# Altium PCB barrido.PcbDoc
Units mm, origin at the board's own origin, x right, y up, seen from the top; angles counter-clockwise.
Board outline 55.25 x 38.25 mm, 2 copper layers (Top Layer, Bottom Layer); 34 components, 46 nets, 104 pads, 14 vias.
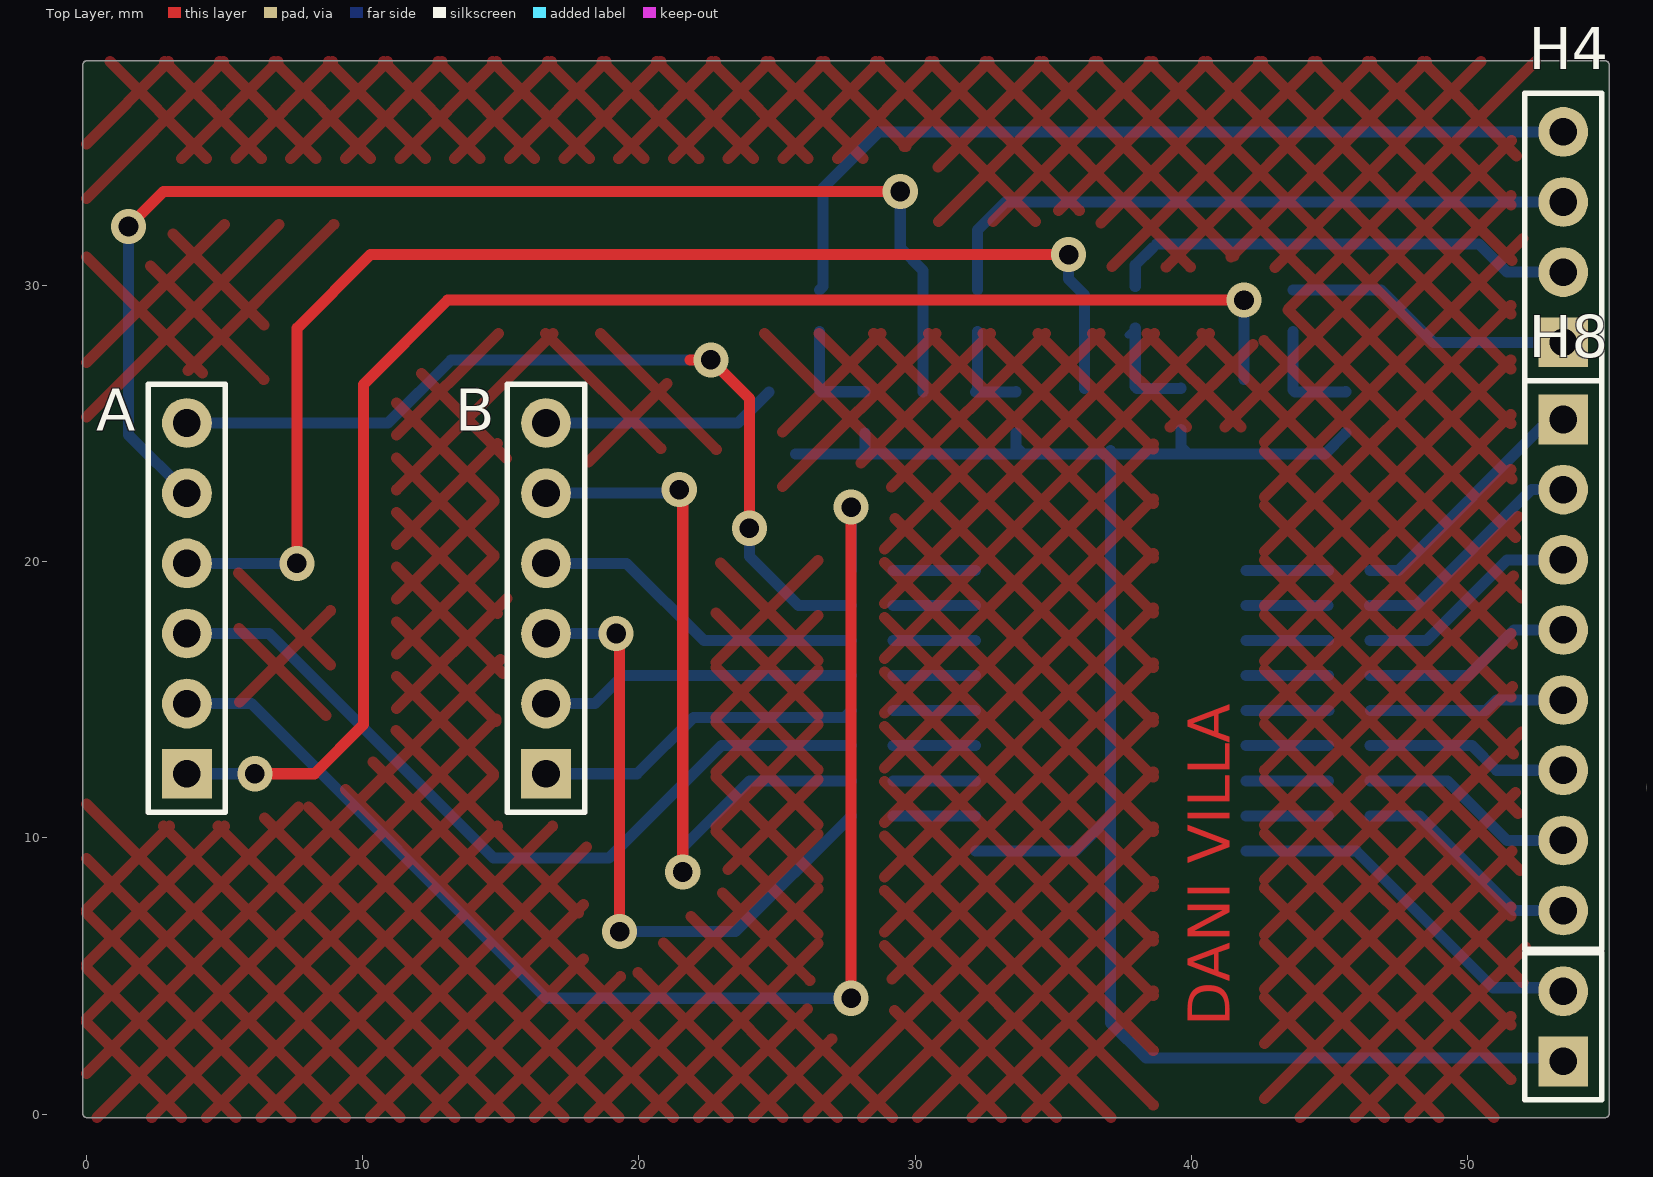
[diagram p0: Top Layer view]
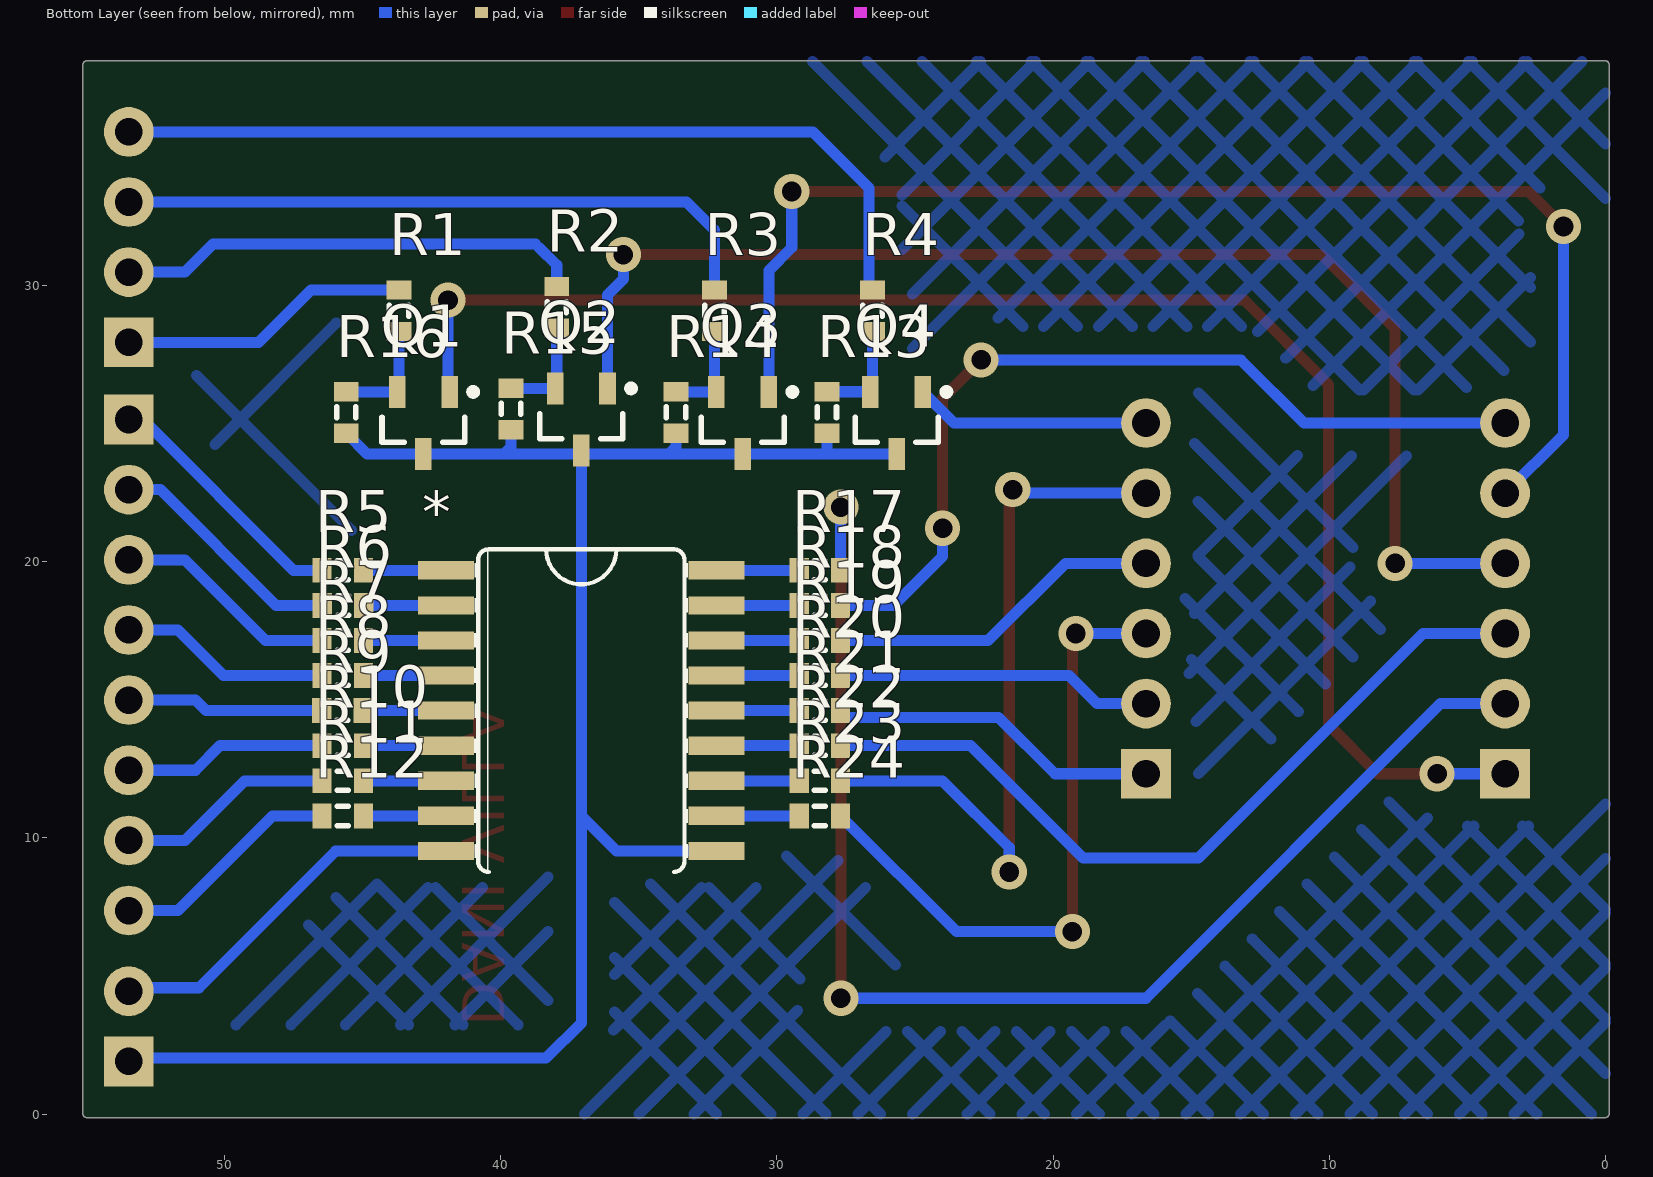
[diagram p1: Bottom Layer view, seen from below]
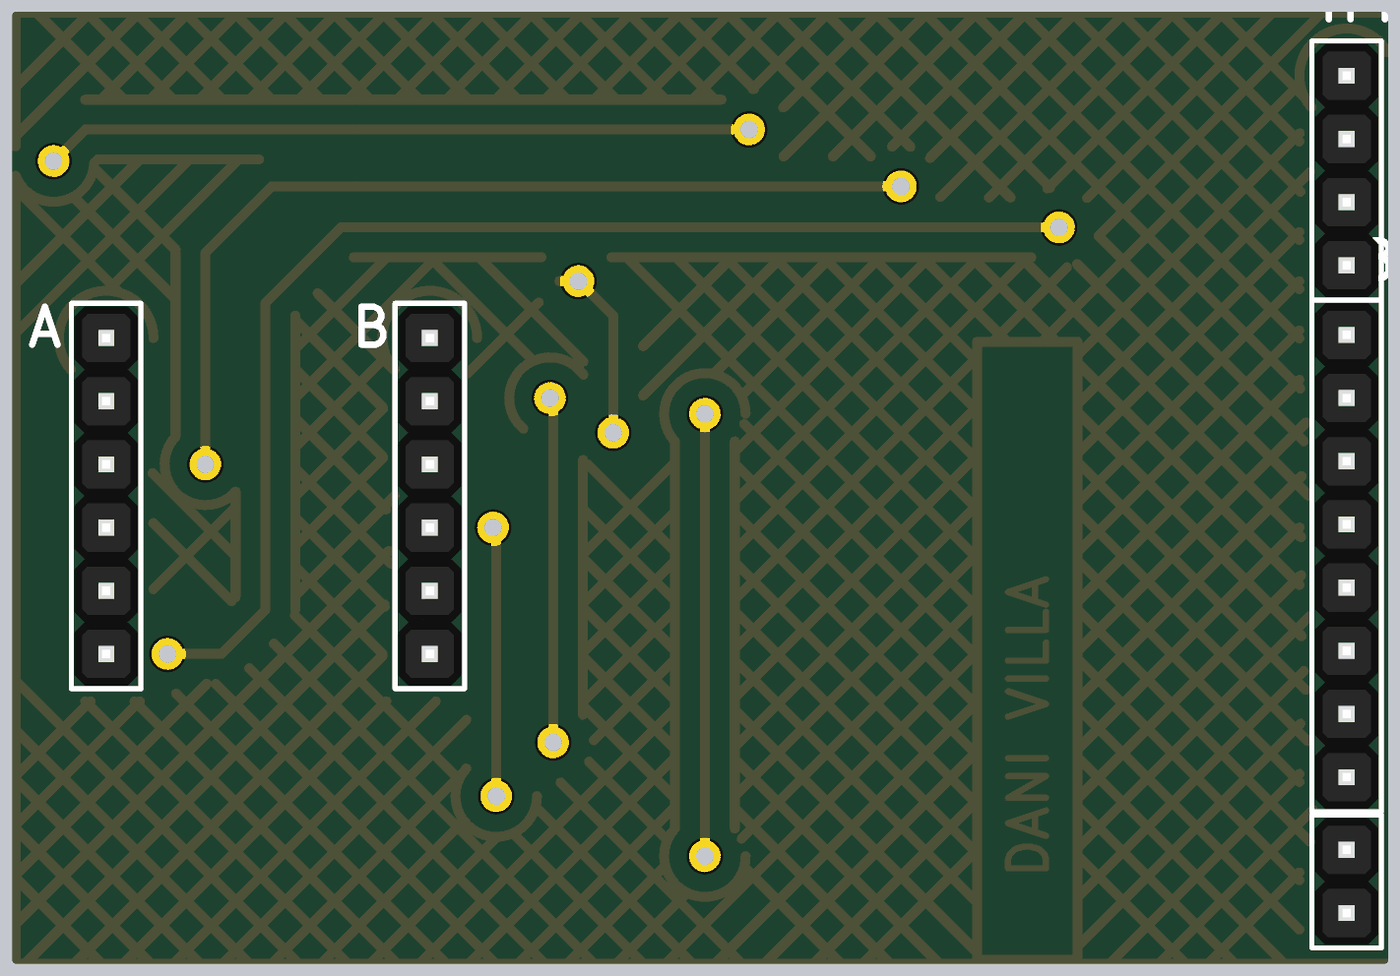
[diagram p2: 3D render of the assembled board from above, using the file's embedded part models]

## Layer stack, top to bottom
Top Solder: solder mask 0.0102, Solder Resist, Dk 3.5
Top Layer: signal copper 0.0356
Dielectric 1: dielectric 0.32, FR-4, Dk 4.8
Bottom Layer: signal copper 0.0356
Bottom Solder: solder mask 0.0102, Solder Resist, Dk 3.5

## Board outline
-0.127,0 -0.127,37.973 cw(c0,37.973) -0.127,37.987 cw(c0,38) 0,38.127 55,38.127 cw(c55,38) 55.127,38 55.127,0 cw(c55,0) 55,-0.127 0,-0.127 cw(c0,0)

## Design rules (kind name [scope] priority, off if disabled: settings)
Clearance Mallac [InPolygon] p1: gap=0.8 ignorepadtopadclearanceinfootprint=FALSE
Clearance [All] p2: gap=0.254 ignorepadtopadclearanceinfootprint=FALSE except(0: Arc-Hole Track-Hole SMDPad-Hole THPad-Hole Via-Hole Fill-Hole Poly-Hole Region-Hole Text-Hole)
PolygonConnect [All] p1: connectstyle=Relief reliefconductorwidth=0.254 reliefentries=4 polygonreliefangle="90 Angle" airgapwidth=0.254
RoutingVias [All] p1: holewidth=0.711 width=1.27 viastyle="Through Hole" minholewidth=0.711 minwidth=1.27 maxholewidth=0.711 maxwidth=1.27
SolderMaskExpansion [All] p1: expansion=0.102 istentingtop=FALSE
Width Mallaw [InPolygon] p1: maxlimit=0.6 minlimit=0.3 preferedwidth=0.5
Width [All] p2: maxlimit=0.6 minlimit=0.3 preferedwidth=0.4
30 further rules are at their usual default settings.

## Components (designator, comment, footprint, x,y, rotation, side; value= is the part's Value field where it differs from the comment)
* "uln2803" *SO18L 37.084,14.605 r270 bottom
A "Connector" "1x6x2.54 Pin Header TH V" 3.637,18.669 r90 top
B "Connector" "1x6x2.54 Pin Header TH V" 16.637,18.669 r90 top
CONN? "Connector" "1x2x2.54 Pin Header TH V" 53.467,3.175 r90 top
H4 "Connector" "1x4x2.54 Pin Header TH V" 53.467,31.75 r90 top
H8 "Connector" "1x8x2.54 Pin Header TH V" 53.467,16.256 r270 top
Q1 "PNP" SOT-23B_N 42.799,25.019 r270 bottom
Q2 "PNP" SOT-23B_N 37.084,25.146 r270 bottom
Q3 "PNP" SOT-23B_N 31.242,25.019 r270 bottom
Q4 "PNP" SOT-23B_N 25.666,25.019 r270 bottom
R1 "Res3" J1-0603 43.688,29.083 r270 bottom value=1K
R2 "Res3" J1-0603 37.973,29.21 r270 bottom value=1K
R3 "Res3" J1-0603 32.258,29.083 r270 bottom value=1K
R4 "Res3" J1-0603 26.543,29.083 r270 bottom value=1K
R5 "Res3" J1-0603 45.72,19.685 r180 bottom value=1K
R6 "Res3" J1-0603 45.708,18.415 r180 bottom value=1K
R7 "Res3" J1-0603 45.72,17.145 r180 bottom value=1K
R8 "Res3" J1-0603 45.72,15.875 r180 bottom value=1K
R9 "Res3" J1-0603 45.732,14.605 r180 bottom value=1K
R10 "Res3" J1-0603 45.72,13.335 r180 bottom value=1K
R11 "Res3" J1-0603 45.72,12.065 r180 bottom value=1K
R12 "Res3" J1-0603 45.72,10.795 r180 bottom value=1K
R13 "Res3" J1-0603 28.194,25.4 r270 bottom value=1K
R14 "Res3" J1-0603 33.655,25.4 r270 bottom value=1K
R15 "Res3" J1-0603 39.624,25.527 r270 bottom value=1K
R16 "Res3" J1-0603 45.593,25.4 r270 bottom value=1K
R17 "Res3" J1-0603 28.448,19.685 r180 bottom value=1K
R18 "Res3" J1-0603 28.448,18.415 r180 bottom value=1K
R19 "Res3" J1-0603 28.448,17.145 r180 bottom value=1K
R20 "Res3" J1-0603 28.448,15.875 r180 bottom value=1K
R21 "Res3" J1-0603 28.448,14.605 r180 bottom value=1K
R22 "Res3" J1-0603 28.448,13.335 r180 bottom value=1K
R23 "Res3" J1-0603 28.448,12.065 r180 bottom value=1K
R24 "Res3" J1-0603 28.448,10.795 r180 bottom value=1K

## Footprints (in the part's own frame and the unit in brackets; to place one, negate y for a bottom-side part, rotate by r counter-clockwise, add the part's x,y. Pads: shape width x height; smd on the part's side, far side on the other; paste and mask are expansions set on the pad)
"1x2x2.54 Pin Header TH V" [mm] "1x2x2.54 Pin Header TH V"
  rect 1.8x1.8 hole 1: 1(-1.27,0)
  round 1.8 hole 1: 2(1.27,0)
  silkscreen extent -2.67,-1.4 2.67,1.4, body extent -2.54,-1.27 2.54,1.27, height 8.55
"1x4x2.54 Pin Header TH V" [mm] "1x4x2.54 Pin Header TH V"
  rect 1.8x1.8 hole 1: 1(-3.81,0)
  round 1.8 hole 1: 2(-1.27,0) 3(1.27,0) 4(3.81,0)
  silkscreen extent -5.21,-1.4 5.21,1.4, body extent -5.08,-1.27 5.08,1.27, height 8.55
"1x6x2.54 Pin Header TH V" [mm] "1x6x2.54 Pin Header TH V"
  rect 1.8x1.8 hole 1: 1(-6.35,0)
  round 1.8 hole 1: 2(-3.81,0) 3(-1.27,0) 4(1.27,0) 5(3.81,0) 6(6.35,0)
  silkscreen extent -7.75,-1.4 7.75,1.4, body extent -7.62,-1.27 7.62,1.27, height 8.55
"1x8x2.54 Pin Header TH V" [mm] "1x8x2.54 Pin Header TH V"
  rect 1.8x1.8 hole 1: 1(-8.89,0)
  round 1.8 hole 1: 2(-6.35,0) 3(-3.81,0) 4(-1.27,0) 5(1.27,0) 6(3.81,0) 7(6.35,0) 8(8.89,0)
  silkscreen extent -10.29,-1.4 10.29,1.4, body extent -10.16,-1.27 10.16,1.27, height 8.55
*SO18L [mil]
  rect 26x80 smd: 1(-200,-193) 2(-150,-193) 3(-100,-193) 4(-50,-193) 5(0,-193) 6(50,-193) 7(100,-193) 8(150,-193) 9(200,-193) 10(200,193) 11(150,193) 12(100,193) 13(50,193) 14(0,193) 15(-50,193) 16(-100,193) 17(-150,193) 18(-200,193)
  silkscreen extent -230,-152 230,152
J1-0603 [mm] "Chip Resistor, Body 1.6x0.8mm, IPC High Density"
  rect 0.7x0.9 smd: 1(-0.75,0) 2(0.75,0)
  silkscreen extent -0.2,-0.35 0.2,0.35, body extent -0.85,-0.48 0.85,0.48, height 0.9
SOT-23B_N [mm] "SOT23, 3-Leads, Body 2.9x1.3mm, Pitch 0.95mm, Lead Span 2.4mm, IPC Medium Density"
  rect 1.15x0.6 smd: 1(-1.125,0.95) 2(-1.125,-0.95) 3(1.125,0)
  silkscreen extent -1.25,-1.5 0.7,1.92, body extent -0.7,-1.5 0.7,1.5, height 1.14

## Part data
A B: library part "Header 1x6"
CONN?: library part "Header 1x2"
H4: library part "Header 1x4"
H8: library part "Header 1x8"
Q1 Q2 Q3 Q4: "PNP Bipolar Transistor", LatestRevisionDate=29-May-2009, LatestRevisionNote="IPC-7351 Footprint Added.", PackageDescription="3-Pin SOT-23 Package 0.95 mm Pitch, 2.4 mm Lead Span", PackageReference=SOT-23B, PackageVersion=Aug-1999, Published=8-Jun-2000, Publisher="Altium Limited"
R1 R2 R3 R4 R5 R6 R7 R8 R9 R10 R11 R12 R13 R14 R15 R16 R17 R18 R19 R20 R21 R22 R23 R24: "Resistor", LatestRevisionDate=29-May-2009, LatestRevisionNote="IPC-7351 Footprint Added.", PackageDescription="Chip Resistor", PackageReference=J1-0603, Published=8-Jun-2000, Publisher="Altium Limited"

## Via types
v1: diameter 1.27, hole 0.711, Top Layer to Bottom Layer, 14 vias

## Nets (pads, with @x,y where several pads share a name; then routed paths per layer and width w, separated by ;. In a path a pad name is that pad's centre, name@x,y a point inside that pad or via, vN(x,y) a via of type N, cw(c..) or ccw(c..) an arc to the next point about the centre after c; other vN are vias at no path point)
0: B.6 Q4.1 | length 8.5
  Bottom Layer w0.4: B.6 23.591,25.019 Q4.1
1: A.5 Q3.1 | length 46.6
  Top Layer w0.4: v1(1.524,32.131) 2.794,33.401 v1(29.464,33.401)
  Bottom Layer w0.4: v1(1.524,32.131) 1.524,24.592 A.5 ; v1(29.464,33.401) 29.464,31.369 30.292,30.541 Q3.1
1b: *.1 R5.2 | length 3
  Bottom Layer w0.4: *.1 R5.2
1c: *.18 R17.1 | length 3
  Bottom Layer w0.4: R17.1 *.18
2: A.4 Q2.1 | length 46.8
  Top Layer w0.4: v1(7.62,19.939) 7.62,28.448 10.287,31.115 v1(35.56,31.115)
  Bottom Layer w0.4: A.4 3.891,19.685 4.145,19.939 v1(7.62,19.939) ; v1(35.56,31.115) 35.56,30.226 36.134,29.652 Q2.1
2b: *.2 R6.2 | length 3
  Bottom Layer w0.4: *.2 R6.2
2c: *.17 R18.1 | length 3
  Bottom Layer w0.4: R18.1 *.17
3: A.1 Q1.1 | length 55.5
  Top Layer w0.4: v1(6.096,12.319) 8.255,12.319 10.033,14.097 10.033,26.416 13.081,29.464 v1(41.91,29.464)
  Bottom Layer w0.4: A.1 v1(6.096,12.319) ; Q1.1@41.91,26.591 v1(41.91,29.464)
3b: *.3 R7.2 | length 3
  Bottom Layer w0.4: *.3 R7.2
3c: *.16 R19.1 | length 3
  Bottom Layer w0.4: R19.1 *.16
4b: *.4 R8.2 | length 3
  Bottom Layer w0.4: *.4 R8.2
4c: *.15 R20.1 | length 3
  Bottom Layer w0.4: R20.1 *.15
5b: *.5 R9.2 | length 3
  Bottom Layer w0.4: *.5 R9.2
5c: *.14 R21.1 | length 3
  Bottom Layer w0.4: R21.1 *.14
6b: *.6 R10.2 | length 3
  Bottom Layer w0.4: *.6 R10.2
6c: *.13 R22.1 | length 3
  Bottom Layer w0.4: R22.1 *.13
7b: *.7 R11.2 | length 3
  Bottom Layer w0.4: *.7 R11.2
7c: *.12 R23.1 | length 3
  Bottom Layer w0.4: R23.1 *.12
8b: *.8 R12.2 | length 3
  Bottom Layer w0.4: *.8 R12.2
8c: *.11 R24.1 | length 3
  Bottom Layer w0.4: R24.1 *.11
a: A.2 R17.2 | length 48.6
  Top Layer w0.4: v1(27.686,4.191) 27.686,21.717 27.813,21.844 v1(27.686,21.971)
  Bottom Layer w0.4: A.2 5.969,14.859 16.637,4.191 v1(27.686,4.191) ; v1(27.686,21.971) 27.698,21.959 R17.2
b: A.6 R18.2 | length 32.8
  Top Layer w0.4: 21.844,27.305 v1(22.606,27.305) 24.003,25.908 v1(24.003,21.209)
  Bottom Layer w0.4: A.6 10.922,25.019 13.208,27.305 v1(22.606,27.305) ; v1(24.003,21.209) 24.003,20.193 25.781,18.415 R18.2
b1: Q1.2 R1.2 R16.1 | length 4.1
  Bottom Layer w0.254: R1.2 R1.2@43.749,28.272
  Bottom Layer w0.4: R1.2 43.688,26.205 Q1.2 45.587,26.144 R16.1
b2: Q2.2 R2.2 R15.1 | length 4.2
  Bottom Layer w0.254: R2.2@37.719,28.206 R2.2
  Bottom Layer w0.4: R2.2 37.973,26.332 Q2.2 39.618,26.271 R15.1
b3: Q3.2 R3.2 R14.1 | length 3.8
  Bottom Layer w0.254: R3.2 R3.2@32.319,28.272 ; Q3.2@32.319,26.144 Q3.2@32.325,26.15
  Bottom Layer w0.4: Q3.2 Q3.2@32.319,26.144 ; R3.2 32.258,26.205 Q3.2@32.319,26.144 ; R14.1 33.649,26.144 Q3.2@32.319,26.144
b4: Q4.2 R4.2 R13.1 | length 3.9
  Bottom Layer w0.254: R4.2 R4.2@26.616,28.26
  Bottom Layer w0.4: R4.2 26.543,26.217 Q4.2 26.622,26.15 R13.1
c: B.4 R19.2 | length 12.2
  Bottom Layer w0.4: B.4 19.558,19.939 22.352,17.145 R19.2
d: B.2 R20.2 | length 11.5
  Bottom Layer w0.4: B.2 18.415,14.859 19.431,15.875 R20.2
e: B.1 R21.2 | length 12
  Bottom Layer w0.4: B.1 19.939,12.319 21.971,14.351 27.444,14.351 R21.2
f: A.3 R22.2 | length 29.1
  Bottom Layer w0.4: A.3 6.604,17.399 14.732,9.271 18.923,9.271 22.987,13.335 R22.2
g: B.5 R23.2 | length 27
  Top Layer w0.4: v1(21.463,22.606) 21.59,22.479 v1(21.59,8.763)
  Bottom Layer w0.4: B.5 v1@21.717,22.479 ; v1(21.59,8.763) 21.59,9.652 24.003,12.065 R23.2
GND: *.9 CONN?.2 | length 13.5
  Bottom Layer w0.4: *.9 45.974,9.525 50.927,4.572 CONN?.2@53.467,4.572
h: B.3 R24.2 | length 23.5
  Top Layer w0.4: v1(19.177,17.399) 19.304,17.272 v1(19.304,6.604)
  Bottom Layer w0.4: B.3 v1(19.177,17.399) ; v1(19.304,6.604) 23.507,6.604 R24.2
r1: H4.1 R1.1 | length 10.6
  Bottom Layer w0.4: R1.1 46.875,29.833 48.768,27.94 H4.1
r2: H4.2 R2.1 | length 16.8
  Bottom Layer w0.4: R2.1 37.973,30.734 38.608,31.369 ; 38.735,31.496 50.419,31.496 51.435,30.48 H4.2
r3: H4.3 R3.1 | length 23.8
  Bottom Layer w0.4: R3.1 32.258,32.004 33.274,33.02 H4.3
r4: H4.4 R4.1 | length 31.4
  Bottom Layer w0.4: R4.1 26.67,29.96 26.67,33.528 28.702,35.56 H4.4
r5: H8.1 R5.1 | length 9.3
  Bottom Layer w0.4: R5.1 47.498,19.685 52.959,25.146 H8.1
r6: H8.2 R6.1 | length 8.7
  Bottom Layer w0.4: R6.1 48.133,18.415 52.324,22.606 H8.2
r7: H8.3 R7.1 | length 8.2
  Bottom Layer w0.4: R7.1 48.514,17.145 51.435,20.066 H8.3
r8: H8.4 R8.1 | length 7.7
  Bottom Layer w0.4: R8.1 50.038,15.875 51.689,17.526 H8.4
r9: H8.5 R9.1 | length 7.7
  Bottom Layer w0.4: R9.1 50.673,14.605 51.054,14.986 H8.5 H8.5@53.086,14.605
r10: H8.6 R10.1 | length 7.4
  Bottom Layer w0.4: R10.1 50.165,13.335 51.054,12.446 H8.6
r11: H8.7 R11.1 | length 7.9
  Bottom Layer w0.4: R11.1 49.276,12.065 51.435,9.906 H8.7
r12: H8.8 R12.1 | length 8.4
  Bottom Layer w0.4: R12.1 48.26,10.795 51.689,7.366 H8.8
VCC: *.10 CONN?.1 Q1.3 Q2.3 Q3.3 Q4.3 R13.2 R14.2 R15.2 R16.2 | length 65.9
  Bottom Layer w0.4: Q4.3 28.194,23.894 ; R13.2 28.194,23.894 ; *.10 35.814,9.525 37.084,10.795 ; R14.2 33.655,24.148 33.909,23.894 ; Q2.3 Q2.3@37.084,23.894 ; R15.2 39.624,24.148 39.878,23.894 ; R16.2 44.837,23.894 Q1.3 39.878,23.894 ; CONN?.1@53.467,2.032 38.354,2.032 37.084,3.302 37.084,10.795 ; 28.194,23.894 Q3.3 33.909,23.894 ; 33.909,23.894 Q2.3@37.084,23.894 ; 37.084,10.795 Q2.3@37.084,23.894 ; Q2.3@37.084,23.894 39.878,23.894

## Polygon pours and split planes (outlines as drawn)
no net on Bottom Layer "Bottom Layer-No Net" (hatched 45Degree grid 1.4 track 0.4, remove dead copper, pour order 30): 0,38.1 55.118,38.1 54.864,37.846 54.864,0 0.127,0 0,0.127
GND on Top Layer "Bottom Layer-No Net" (hatched 45Degree grid 1.4 track 0.4, remove dead copper, pour order 34): 0,38.1 54.991,38.1 55.118,37.973 55.118,-0.127 0.127,-0.127 0,0

## Other copper
Top Layer:
  text "DANI VILLA" at 41.402,3.175 h1.52 r90

## Silkscreen, mask and mechanical layers (free items; w line width, h text height)
Mechanical 1:
  lines w0.254: 0,37.973 0,0 55,0 55,38 0,38